# Altium PCB AVT5805_PCB_DF.PcbDoc
Units mil, origin at the board's own origin, x right, y up, seen from the top; angles counter-clockwise.
Board outline 3628.29 x 1110 mil, 2 copper layers (Top Layer, Bottom Layer); 19 components, 14 nets, 60 pads, 80 vias.
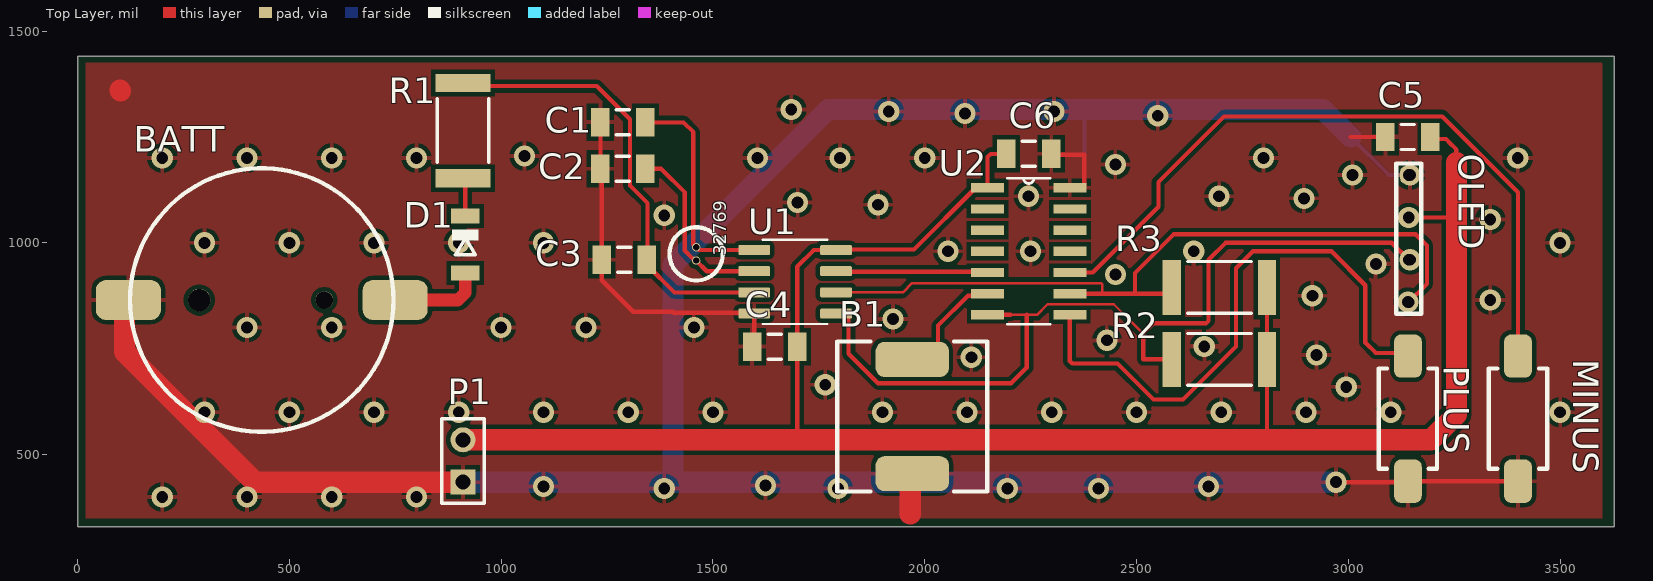
[diagram p0: Top Layer view]
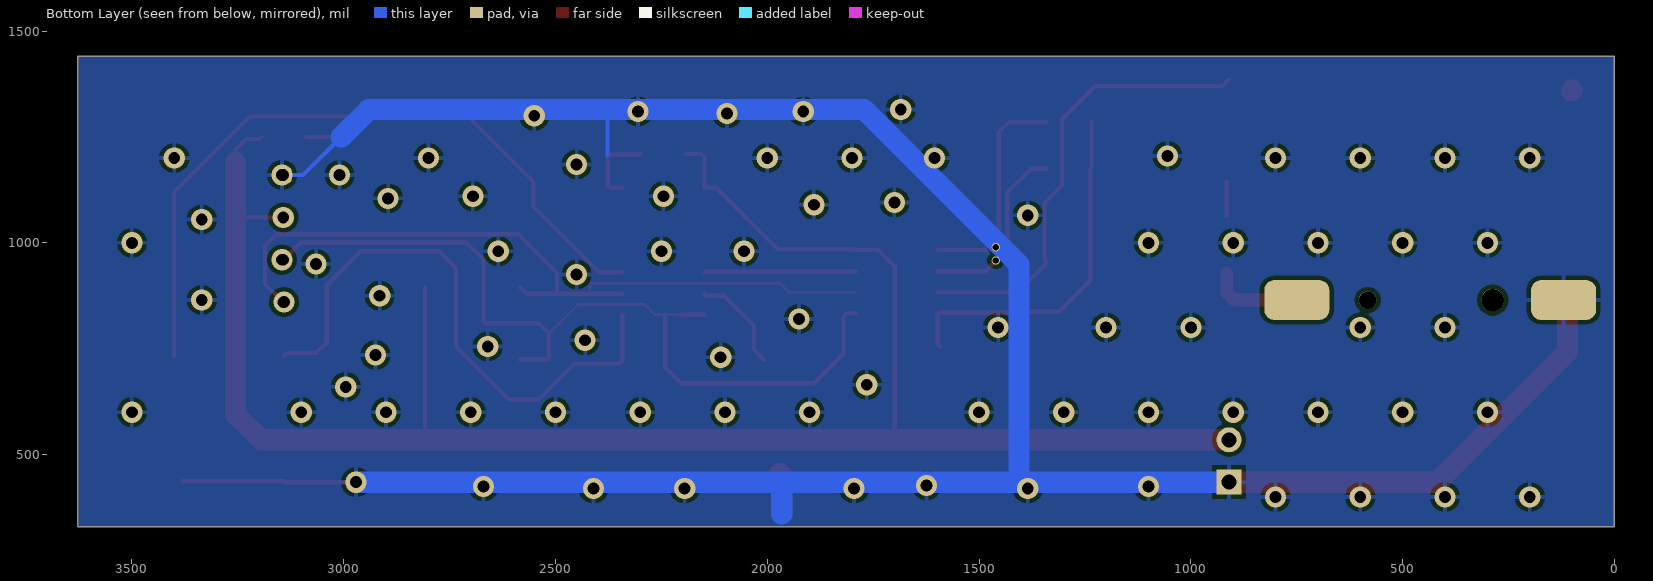
[diagram p1: Bottom Layer view, seen from below]

## Layer stack, top to bottom
Top Solder: solder mask 0.4, Solder Resist, Dk 3.5
Top Layer: signal copper 1.4
Dielectric 1: dielectric 12.6, FR-4, Dk 4.8
Bottom Layer: signal copper 1.4
Bottom Solder: solder mask 0.4, Solder Resist, Dk 3.5

## Board outline
0,330 0,1440 3628.29,1440 3628.29,330

## Design rules (kind name [scope] priority, off if disabled: settings)
Clearance [All] p1: gap=10 ignorepadtopadclearanceinfootprint=FALSE except(0: Arc-Hole Track-Hole SMDPad-Hole THPad-Hole Via-Hole Fill-Hole Poly-Hole Region-Hole Text-Hole)
PolygonConnect [All] p1: connectstyle=Relief reliefconductorwidth=10 reliefentries=4 polygonreliefangle="90 Angle" airgapwidth=10
RoutingVias [All] p1: holewidth=28 width=50 viastyle="Through Hole" minholewidth=28 minwidth=50 maxholewidth=28 maxwidth=50
SolderMaskExpansion [All] p1: expansion=4 istentingtop=FALSE
Width [All] p1: maxlimit=50 minlimit=6 preferedwidth=10 minimp=50.000000 maximp=50.000000 favimp=50.000000
30 further rules are at their usual default settings.

## Components (designator, comment, footprint, x,y, rotation, side; value= is the part's Value field where it differs from the comment)
32769 "Q1" DT-38 1460.36,973.89 r270 top
B1 "Buzzer_DF" LPT9018BS 1970.64,589.84 r270 top
BATT "3,3...5 V" DS1092 435.04,865 r180 top
C1 "Cap Semi" C1206 1287.49,1285 r0 top value=100pF
C2 "Cap Semi" C1206 1287.49,1175 r0 top value=100pF
C3 "Cap Semi" C1206 1290.64,960 r0 top value=100pF
C4 "Cap Semi" C1206 1645.64,755 r0 top value=100nF
C5 "Cap Semi" C1206 3140.64,1250 r0 top value=100nF
C6 "Cap Semi" C1206 2245.64,1210 r180 top value=100nF
D1 "BAS85.115_DF" MINIMELF 915,995 r270 top
MINUS "Button_DF" DTSM31NB 3400.64,585 r90 top
OLED "128x32px, 0,91\", SSD1306, I2C" SSD1306 3142.49,1010 r0 top
P1 "3,3...5V" HDR1X2 910,435 r90 top
PLUS "Button_DF" DTSM31NB 3140.64,585 r90 top
R1 "Res2" RESC6332 910,1265 r90 top value=1K
R2 "Res2" RESC6332 2695.64,725 r0 top value=1K
R3 "Res2" RESC6332 2695.64,895 r0 top value=1K
U1 "MCP79410-I_SN_DF" SO08 1692.49,910 r0 top
U2 "ATtiny84A_DF" SOIC14 2245.49,980 r0 top

## Footprints (in the part's own frame and the unit in brackets; to place one, negate y for a bottom-side part, rotate by r counter-clockwise, add the part's x,y. Pads: shape width x height; smd on the part's side, far side on the other; paste and mask are expansions set on the pad)
C1206 [mm] "Chip Capacitor, Body 3.2x1.6mm, IPC High Density"
  rect 1.1x1.7 smd: 1(-1.35,0) 2(1.35,0)
  silkscreen extent -0.4,-0.75 0.4,0.75, body extent -1.7,-0.9 1.7,0.9, height 1.3
DS1092 [mm]
  rrect50% 3.9x2.4 all layers, no hole: 1(-8,0) 2(8,0)
  round 1.05 hole 1.05: 3(-3.75,0)
  round 1.35 hole 1.35: 4(3.75,0)
  silkscreen extent -7.9,-7.9 7.9,7.9
DT-38 [mm]
  round 0.5 hole 0.376: 1(-0.4,0) 2(0.4,0)
  silkscreen extent -1.6,-1.6 1.6,1.6
DTSM31NB [mm]
  rrect50% 2.598x1.663 smd: 1(-3.75,0) 2(3.75,0)
  silkscreen extent -3,-1.75 3,1.75
HDR1X2 [mm] "Connector; Header; 2 Position"
  rect 1.5x1.5 hole 0.9: 1(0,0)
  round 1.5 hole 0.9: 2(2.54,0)
  silkscreen extent -1.27,-1.27 3.81,1.27
LPT9018BS [mm]
  rrect50% 2.1x4.4 smd: 1(-3.425,0) 2(3.425,0)
  silkscreen extent -4.5,-4.5 4.5,4.5
MINIMELF [mm]
  rect 0.9x1.7 smd: 1(-1.732,0.012) 2(1.668,0.012)
  silkscreen extent -0.9,-0.78 0.6,0.8
RESC6332 [mm] "Chip Resistor, Body 6.3x3.2mm, IPC High Density"
  rect 1.1x3.3 smd: 1(-2.85,0) 2(2.85,0)
  silkscreen extent -1.9,-1.55 1.9,1.55, body extent -3.22,-1.68 3.22,1.68, height 0.9
SO08 [mm]
  rrect25% 1.9x0.6 smd: 1(-2.416,1.854) 2(-2.416,0.584) 3(-2.416,-0.686) 4(-2.416,-1.956) 5(2.494,-1.956) 6(2.494,-0.686) 7(2.494,0.584) 8(2.494,1.854)
  silkscreen extent -4.42,-2.58 1.99,2.55
SOIC14 [mil]
  rect 78x22 smd: 1(-97,150) 2(-97,100) 3(-97,50) 4(-97,0) 5(-97,-50) 6(-97,-100) 7(-97,-150) 8(97,-150) 9(97,-100) 10(97,-50) 11(97,0) 12(97,50) 13(97,100) 14(97,150)
  silkscreen extent -51,-172 51,172
SSD1306 [mm]
  rrect50% 1x1 hole 0.7: 1(0,3.81)
  round 1 hole 0.7: 2(0,1.27) 3(0,-1.27) 4(0,-3.81)
  silkscreen extent -0.75,-4.5 0.75,4.5

## Part data
32769: library part Quartz_resonator_DF
BATT: library part Battery_Socket_DF
C1 C2 C3 C4 C5 C6: "Capacitor (Semiconductor SIM Model)", LatestRevisionDate=29-May-2009, LatestRevisionNote="IPC-7351 Footprint Added.", PackageDescription="Chip Capacitor", PackageReference=C1206, Published=8-Jun-2000, Publisher="Altium Limited"
OLED: library part OLED_Screen_DF
P1: library part "Header 2", "Header, 2-Pin", LatestRevisionDate=17-Jul-2002, LatestRevisionNote="Re-released for DXP Platform.", Publisher="Altium Limited"
R1 R2 R3: "Resistor", LatestRevisionDate=17-Jul-2002, LatestRevisionNote="Re-released for DXP Platform.", PackageDescription="Axial Device, Thru-Hole; 2 Leads; 0.4 in Pin Spacing", PackageReference=AXIAL-0.4, Published=8-Jun-2000, Publisher="Altium Limited"

## Via types
v1: diameter 50, hole 28, Top Layer to Bottom Layer, 80 vias

## Nets (pads, with @x,y where several pads share a name; then routed paths per layer and width w, separated by ;. In a path a pad name is that pad's centre, name@x,y a point inside that pad or via, vN(x,y) a via of type N, cw(c..) or ccw(c..) an arc to the next point about the centre after c; other vN are vias at no path point)
GND: B1.2 BATT.2 C1.1 C2.1 C3.1 C4.1 C5.1 C6.1 MINUS.1 OLED.1 P1.1 PLUS.1 U1.4 U2.14 | length 7380.5
  Top Layer w10: C1.1 C2.1 1237.49,1171.85 1237.49,911.54 1311.74,837.28 1405.64,837.28 ; 1409.93,832.99 1412.08,835.14 1595.22,835.14 U1.4 1597.37,759.88 C4.1 ; C6.1 2300.59,1208.2 2377.09,1208.2 2376.49,1207.6 2376.49,1136 2370.49,1130 U2.14 ; v1(2970.64,435) 3138.28,435 PLUS.1 MINUS.1@3380.64,437.36 ; 3005.64,1250 C5.1 ; OLED.1 v1(3145.64,1160)
  Top Layer w50: 100,1360 101.25,1358.75 ; BATT.2@118.04,855 118.04,850.16 110.64,842.76 110.64,742.76 418.39,435 P1.1 ; 1965.64,359.84 1965.64,450 B1.2
  Bottom Layer w10: 2377.09,1208.2 2377.09,1315 ; 3005.64,1250 3095.64,1160 v1(3145.64,1160)
  Bottom Layer w50: P1.1 1405.64,435 ; 1965.64,359.84 1965.64,435 ; v1(2970.64,435) 1965.64,435 ; 3005.64,1250 2940.64,1315 2377.09,1315 1771.47,1315 1405.64,949.16 1405.64,435 ; 1405.64,435 1965.64,435
  other v1: 200,400 400,400 600,400 800,400 1385,420 1795,420 2195,420 2410,420 1100,425 2670,425 1623.86,427.38 300,600 500,600 700,600 900,600 1100,600 1300,600 1500,600 1900,600 2100,600 2300,600 2500,600 2700,600 2900,600 3100,600 3500,600 2995,660 1765,665 2110,730 2925,735 2660,755 2430,770 400,800 600,800 1000,800 1200,800 1455,800 1925,820 3335,865 2915,875 2450,925 3065,950 2055,980 2250,980 2635,980 300,1000 500,1000 700,1000 900,1000 1100,1000 3500,1000 3335,1055 1385,1064.89 1890,1090 1700,1095 2895,1105 2245,1110 2695,1110 3010,1160 2450,1185 200,1200 400,1200 600,1200 800,1200 1605,1200 1800,1200 2000,1200 2800,1200 3400,1200 1055,1205 2550,1300 2095,1305 1915,1310 2305,1310 1685,1315
MISO: PLUS.2 U2.8 | length 1379.8
  Top Layer w10: U2.8 2342.49,720.86 2348.35,715 2455,715 2540,630 2610,630 2735,755 2735,940 2775,980 2960,980 3040,900 3040,765 3065,740 3133.28,740 PLUS.2
MOSI: OLED.3 R2.1 U1.5 U2.7 | length 2067.5
  Top Layer w6: 2202.49,830 2240.64,830 2265,830 2290,855 2446.28,855 2515.64,785.64
  Top Layer w10: U1.5 1813.32,832.99 1820.13,826.18 1820.13,738.14 1889.92,668.35 2203.99,668.35 2240.64,705 2240.64,830 ; U2.7 2202.49,830 ; R2.1 2515.64,725 2515.64,785.64 2540,810 2664.14,810 2670,815.86 2670,960 2710,1000 3102.49,1000 OLED.3
  Bottom Layer w10: OLED.3 v1(3145.64,960) OLED.3@3145.64,956.85
Net32769_1: 32769.1 C1.2 U1.1 | length 537.1
  Top Layer w10: C1.2 1341.34,1284.3 1430.7,1284.3 1453.72,1261.28 1453.72,996.28 1467.01,982.99 1498.63,982.99 U1.1
Net32769_2: 32769.2 C2.2 U1.2 | length 436.3
  Top Layer w10: C2.2 1377.29,1175 1433.72,1118.57 1433.72,981.15 1451.89,962.98 1452.9,962.98 1457.85,958.03 32769.2@1459.16,958.03 ; 32769.2 1485.51,932.99 U1.2
NetB1_1: B1.1 U2.6 | length 237.6
  Top Layer w10: B1.1@2008.45,724.68 2031.58,747.82 2031.58,804.58 2102.14,875.14 2143.63,875.14 U2.6
NetBATT_1: BATT.1 D1.2 | length 219.5
  Top Layer w30: BATT.1 897.9,865 915.47,882.57 D1.2
NetC3_2: C3.2 R1.2 U1.3 | length 1074.1
  Top Layer w10: R1.2@910.64,1385 925.64,1370 1225.67,1370 1303.99,1291.69 1303.99,1135.32 1345.64,1093.67 1345.64,961.85 C3.2 1343.79,948.19 1408.99,882.99 U1.3
NetD1_1: D1.1 R1.1 | length 81.8
  Top Layer w10: D1.1 R1.1@915.47,1145
NetMINUS_2: MINUS.2 U2.10 | length 1705.8
  Top Layer w10: U2.10 2396.49,930 2551.69,1085.2 2551.69,1143.26 2706.9,1298.46 3221.66,1298.46 3400.64,1119.48 MINUS.2
NetU1_7: U1.7 U2.5 | length 359.1
  Top Layer w10: U1.7 1792.17,931.5 2146.99,931.5 U2.5
RES: U2.4
SCL: OLED.4 R3.1 U1.6 U2.9 | length 1848
  Top Layer w6: U1.6 1948.27,882.99 1970.28,905 2416.04,905 2419.55,901.49 2419.55,880
  Top Layer w10: U2.9 2419.55,880 2496.62,880 ; R3.1 2568.43,880 2496.62,880 ; v1(3140.64,860) OLED.4 3185.64,903.15 3185.64,993.5 3159.14,1020 2587.6,1020 2496.62,929.02 2496.62,880
VCC: C4.2 C5.2 C6.2 OLED.2 P1.2 R2.2 R3.2 U1.8 U2.1 | length 4597.2
  Top Layer w10: 1698.79,535 C4.2 1698.79,943.5 1738.28,982.99 U1.8 1791.68,984 1974.49,984 2120.49,1130 U2.1 2148.49,1202.65 2155.84,1210 C6.2 ; R3.2 R2.2 2807.84,536.25 2809.09,535 ; v1(3142.49,1060) 3254.25,1060 3255,1060.75 ; C5.2 3198.79,1245 3230.44,1245 3236.3,1239.14 3236.3,1238.7 3255,1220 3255,1190
  Top Layer w50: P1.2 1698.79,535 2809.09,535 3195,535 3255,595 3255,1060.75 3255,1190
pads on no net: BATT.3 BATT.4 U2.2 U2.3 U2.11 U2.12 U2.13

## Polygon pours and split planes (outlines as drawn)
GND on Bottom Layer "GND_L02_P001" (solid, pour order 1): 0,1440 3625,1440 3625,335 3620,330 0,330
GND on Top Layer "GND_L01_P000" (solid, remove dead copper, pour order 0): 20,1425 3605,1425 3600,1420 3600,350 20,350